# Altium PCB Master.PcbDoc
Units mm, origin at the board's own origin, x right, y up, seen from the top; angles counter-clockwise.
Board outline 60 x 48.5 mm, 2 copper layers (Top Layer, Bottom Layer); 56 components, 34 nets, 181 pads, 79 vias.
Unrouted connection lines stored in the file: 1.
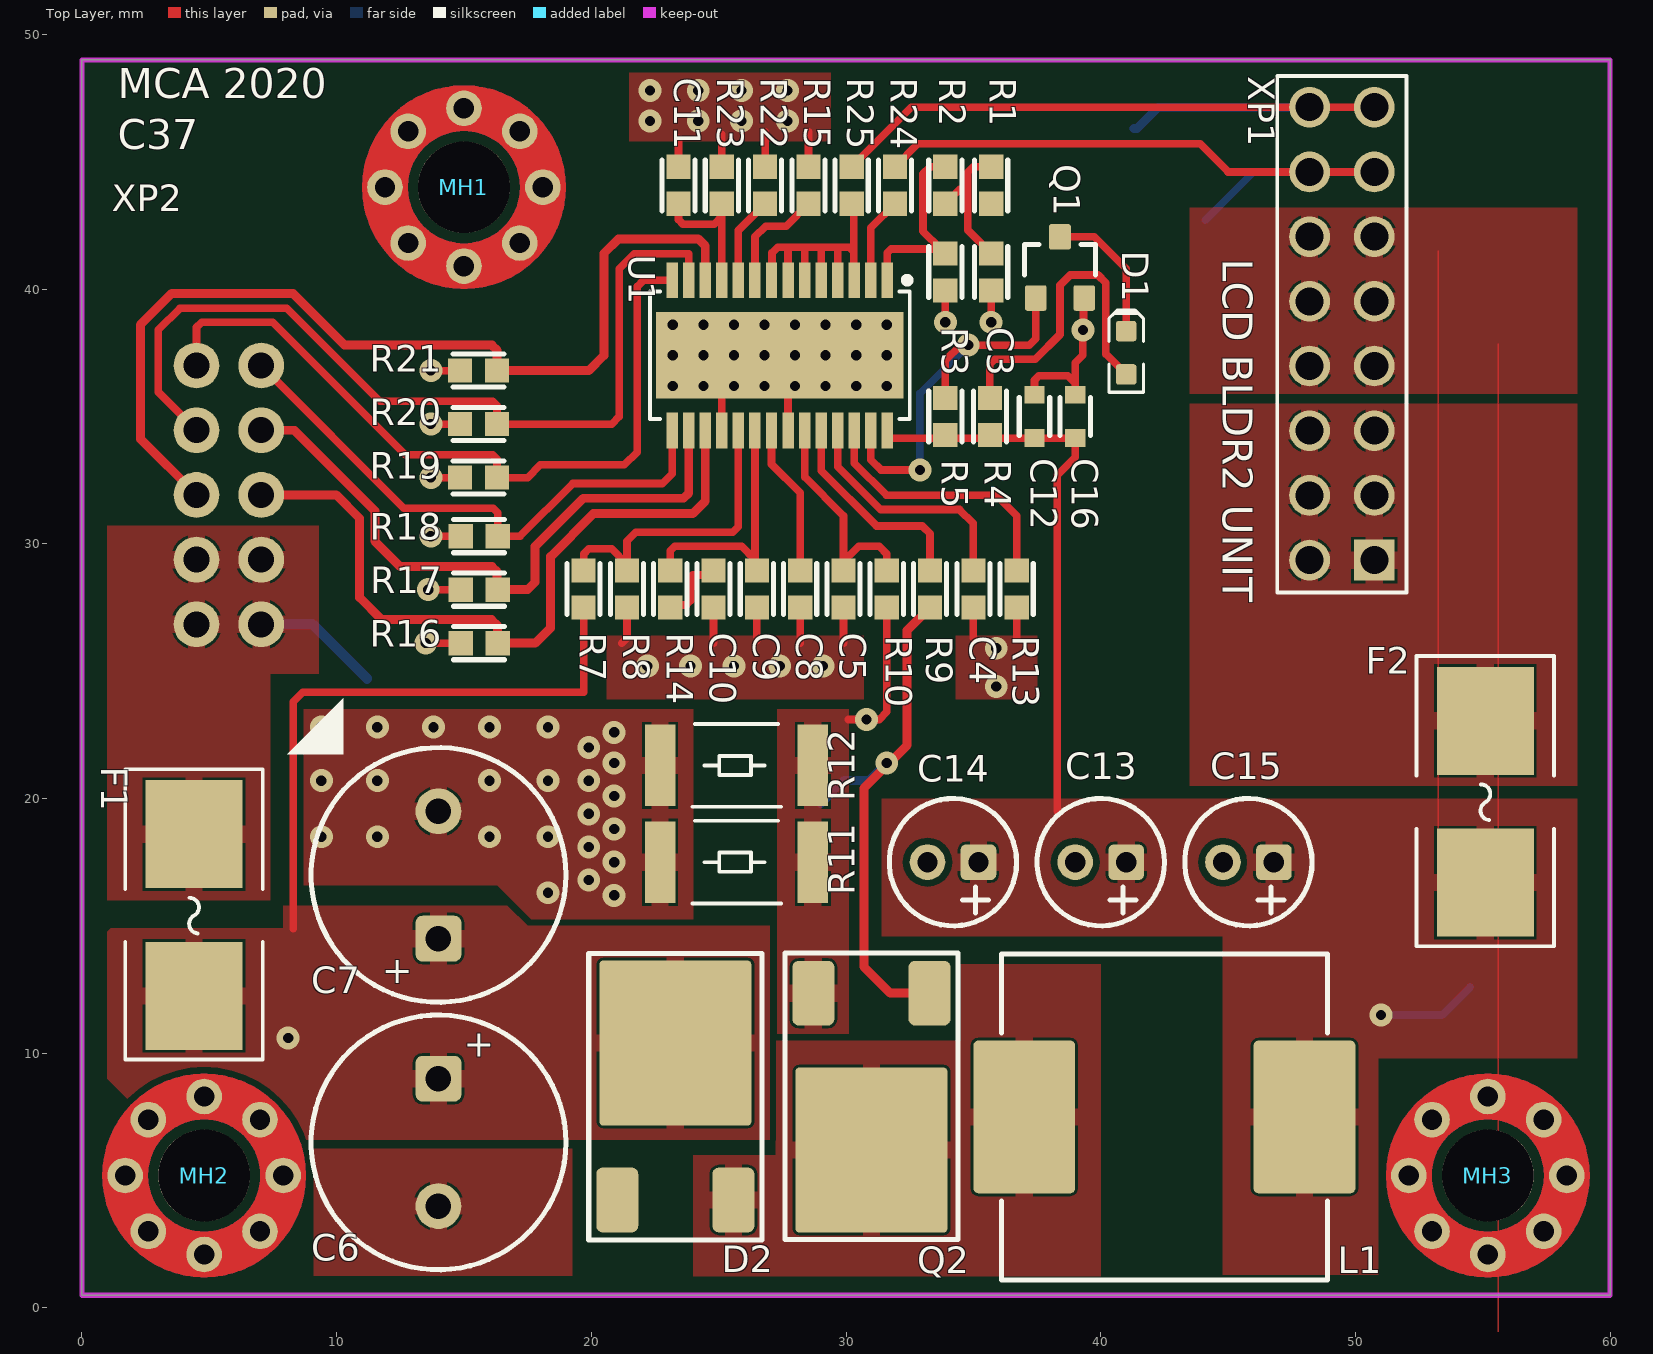
[diagram p0: Top Layer view]
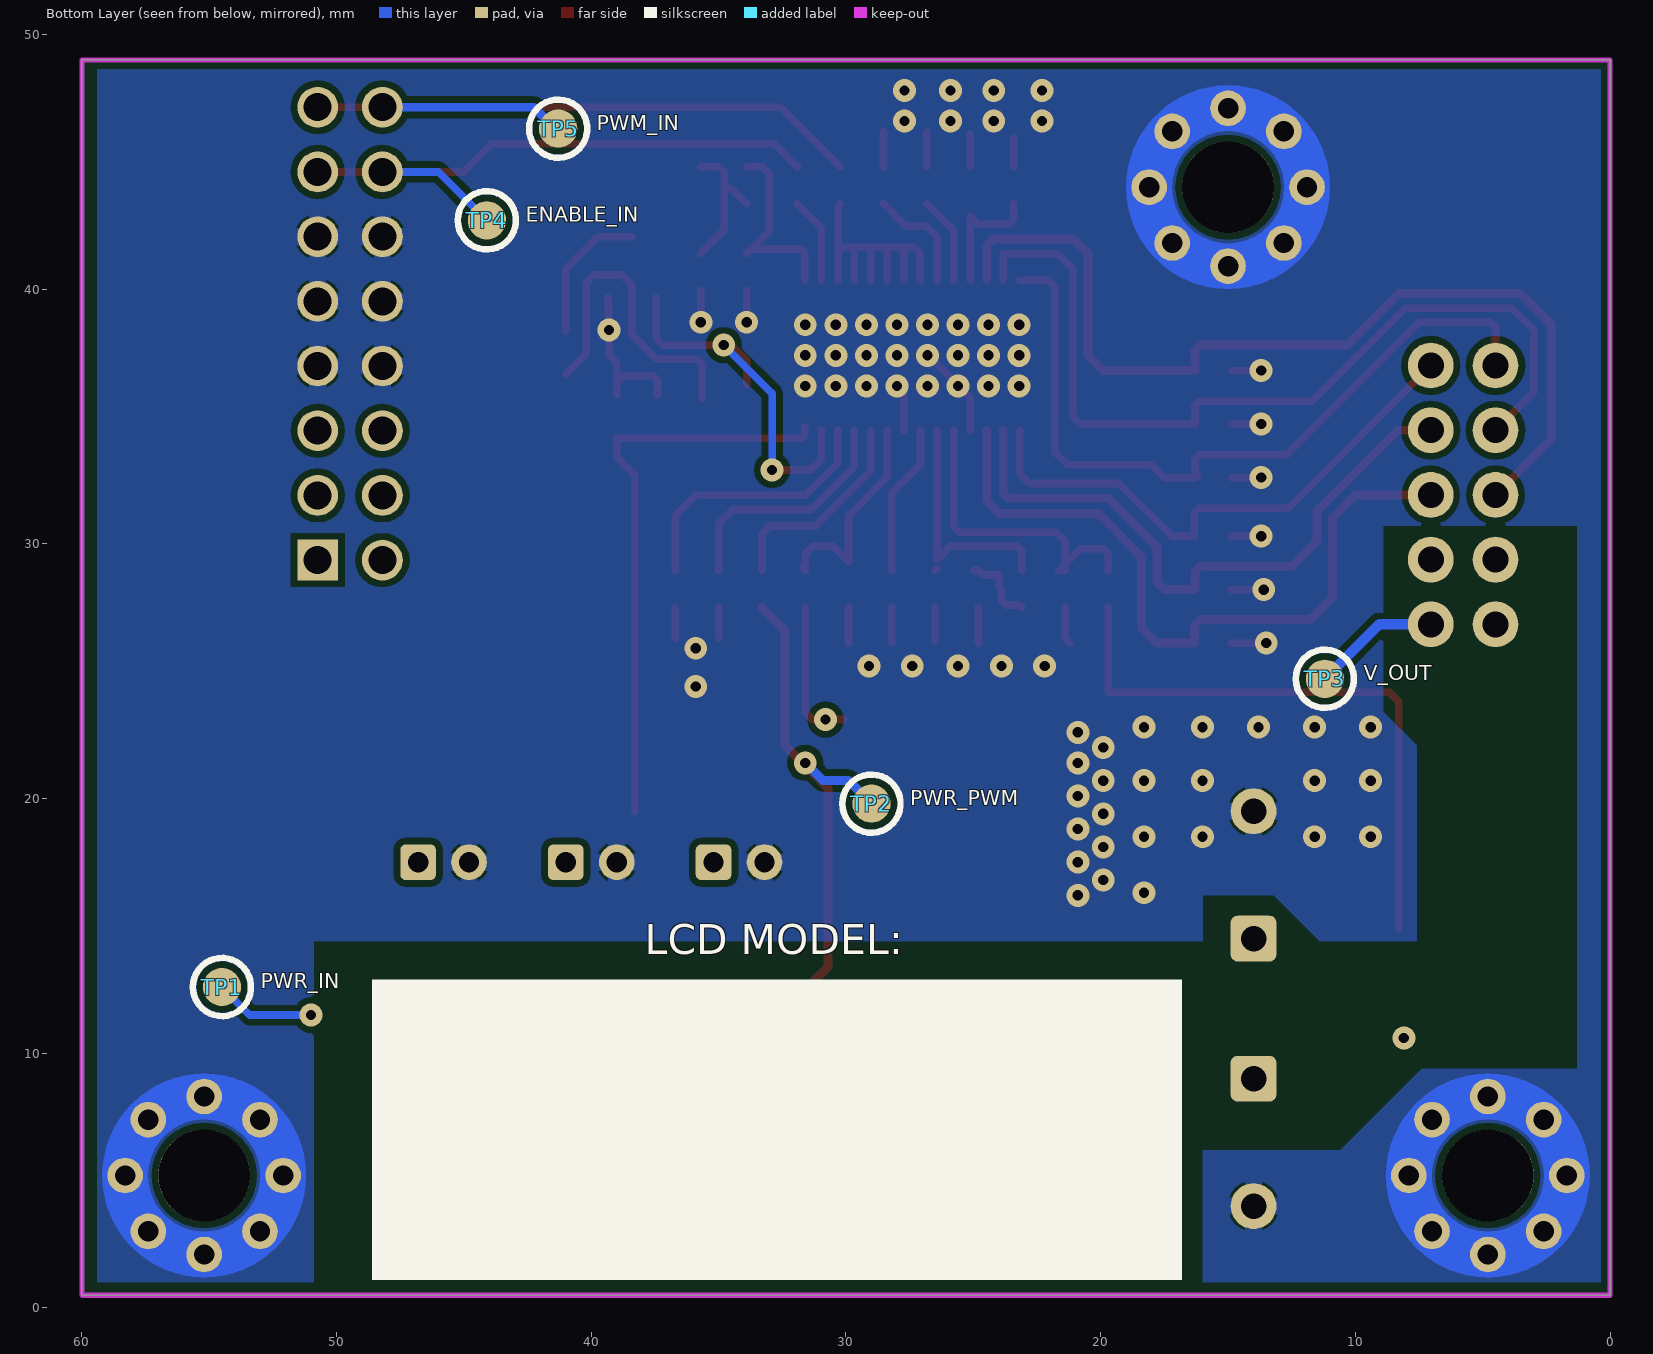
[diagram p1: Bottom Layer view, seen from below]

## Layer stack, top to bottom
Top Solder: solder mask 0.0102, Solder Resist, Dk 3.5
Top Layer: signal copper 0.0356
Dielectric 1: dielectric 0.32, FR-4, Dk 4.8
Bottom Layer: signal copper 0.0356
Bottom Solder: solder mask 0.0102, Solder Resist, Dk 3.5

## Board outline
0,0.5 0,49 60,49 60,0.5

## Design rules (kind name [scope] priority, off if disabled: settings)
Clearance Clearance_1 [(ObjectKind = 'Pad') And (Component = 'U1')] p1: gap=0.127 ignorepadtopadclearanceinfootprint=FALSE
Clearance [All] p2: gap=0.254 ignorepadtopadclearanceinfootprint=FALSE
HoleSize [All] p1: absolutevalues=TRUE maxlimit=10 minlimit=0.4 maxpercent=80.000 minpercent=20.000
PlaneConnect PlaneConnect_VIA [(ObjectKind = 'Via')] p1: planeconnectstyle=Direct reliefexpansion=0.508 reliefentries=4 reliefconductorwidth=0.254 reliefairgap=0.254
PlaneConnect [All] p2: planeconnectstyle=Relief reliefexpansion=0.7 reliefentries=4 reliefconductorwidth=0.5 reliefairgap=0.254
PolygonConnect PolygonConnect_VIA [(ObjectKind = 'Via')] p1: connectstyle=Direct reliefconductorwidth=0.254 reliefentries=4 polygonreliefangle="90 Angle" airgapwidth=0.254
PolygonConnect [All] p2: connectstyle=Relief reliefconductorwidth=0.7 reliefentries=4 polygonreliefangle="90 Angle" airgapwidth=0.1
RoutingVias [All] p1: holewidth=0.711 width=1.27 viastyle="Through Hole" minholewidth=0.711 minwidth=1.27 maxholewidth=0.711 maxwidth=1.27
SolderMaskExpansion [All] p1: expansion=0.102
Width [All] p1: maxlimit=12 minlimit=0.3 preferedwidth=0.3
28 further rules are at their usual default settings.

## Components (designator, comment, footprint, x,y, rotation, side; value= is the part's Value field where it differs from the comment)
C3 "0603-X7R-50-0.01 мкф" CAP_0603#1 35.7,40.675 r270 top
C4 "0603-X5R-10 1 мкф" CAP_0603#1 35,28.225 r270 top
C5 "0603-NP0-50-390 пф J" CAP_0603#1 29.9,28.225 r270 top
C6 "ECAP 47uF 100V 10x12.5" "CAP_ECR 10X12.5" 14,6.5 r270 top
C7 "ECAP 47uF 100V 10x12.5" "CAP_ECR 10X12.5" 14,17 r90 top
C8 "0603-X7R-10 2.2 мкф" CAP_0603#1 28.2,28.225 r270 top
C9 "0603-NP0-50-33 пф J" CAP_0603#1 26.5,28.225 r270 top
C10 "0603-X7R-50-0.033 мкф" CAP_0603#1 24.8,28.225 r270 top
C11 "0603-X7R-50-0.1 мкф" CAP_0603#1 23.425,44.075 r90 top
C12 "0603-X7R-10 2.2 мкф" CAP_0603#2 37.4,35 r90 top
C13 "ESX 50 в-10 мкф 5x11 Hitano" "CAP_ECR 5X11" 41,17.5 r180 top
C14 "ECAP (К50-35), 100мкФ, 35В, 105°C, 20%, 6.3x12мм P:2.5мм" "CAP_ECR 5X11" 35.2,17.5 r180 top
C15 "ECAP (К50-35), 100мкФ, 35В, 105°C, 20%, 6.3x12мм P:2.5мм" "CAP_ECR 5X11" 46.8,17.5 r180 top
C16 "0603-X7R-50-0.1 мкф" CAP_0603#2 39,35 r90 top
D1 "KPT-1608SURCK, KingBright" LED_0603_RED 41,37.5 r90 top value=KPT-1608SURCK
D2 "STPS5H100B" D-PAK 23.3,2.97 r0 top
F1 "2A" FUSE_LITTEL_0154 4.4,15.25 r90 top
F2 "" FUSE_LITTEL_0154 55.1,19.7 r90 top
L1 "47uH" INDUCTOR_B82477G 42.5,7.5 r180 top
MH1 "MOUNTING HOLE 3MM" "MOUNTING HOLE 3MM" 15,44 r0 top
MH2 "MOUNTING HOLE 3MM" "MOUNTING HOLE 3MM" 4.8,5.2 r0 top
MH3 "MOUNTING HOLE 3MM" "MOUNTING HOLE 3MM" 55.2,5.2 r0 top
Q1 "MMUN2214LT1G" SOT_23 38.4,40.85 r0 top locked
Q2 "FDD86102LZ" D-PAK 31,13.63 r180 top
R1 "0603-100к J" resistor_0603 35.7,44.075 r270 top value=100k
R2 "0603-100к J" resistor_0603 33.9,44.075 r270 top value=100k
R3 "0603-30к F" resistor_0603 33.9,40.675 r90 top value=30k
R4 "0603-7.5 к F" resistor_0603 35.65,35 r270 top value=7.5k
R5 "0603-30к F" resistor_0603 33.9,35 r270 top value=30k
R7 "0603-169 к F" resistor_0603 19.7,28.225 r270 top value=169k
R8 "0603-7.5 к F" resistor_0603 21.4,28.225 r90 top value=7.5k
R9 "0603-3 F" resistor_0603 33.3,28.225 r270 top value=3
R10 "0603-200 F" resistor_0603 31.6,28.225 r270 top value=200
R11 "2512-0.1 F" resistor_2512 25.7,17.5 r0 top value=0.1
R12 "2512-0.1 F" resistor_2512 25.7,21.3 r0 top value=0.1
R13 "0603-82 к J" resistor_0603 36.7,28.225 r270 top value=82k
R14 "0603-330 J" resistor_0603 23.1,28.225 r90 top value=330k
R15 "0603-560 к F" resistor_0603 28.525,44.075 r270 top value=560k
R16 "0603-10к J" resistor_0603 15.6,26.1 r0 top value=10k
R17 "0603-10к J" resistor_0603 15.6,28.2 r0 top value=10k
R18 "0603-10к J" resistor_0603 15.6,30.3 r0 top value=10k
R19 "0603-10к J" resistor_0603 15.575,32.6 r0 top value=10k
R20 "0603-10к J" resistor_0603 15.575,34.7 r0 top value=10k
R21 "0603-10к J" resistor_0603 15.575,36.8 r0 top value=10k
R22 "0603-82 к J" resistor_0603 26.825,44.075 r270 top value=82k
R23 "0603-69.8 к F" resistor_0603 25.125,44.075 r270 top value=69.8k
R24 "0603-3 F" resistor_0603 31.925,44.075 r270 top value=3
R25 "0603-3 F" resistor_0603 30.225,44.075 r270 top value=3
TP1 "PWR_IN" OTHER_SMD_TP_1.5MM 54.5,12.6 r180 bottom
TP2 "PWR_PWM" OTHER_SMD_TP_1.5MM 29,19.8 r180 bottom
TP3 "V_OUT" OTHER_SMD_TP_1.5MM 11.2,24.7 r180 bottom
TP4 "ENABLE_IN" OTHER_SMD_TP_1.5MM 44.1,42.7 r180 bottom
TP5 "PWM_IN" OTHER_SMD_TP_1.5MM 41.3,46.3 r180 bottom
U1 "TPS61196PWPT(R)" HTSSOP_28 27.4,37.4 r270 top
XP1 "IN" "CONN_PBD-16 RA" 49.47,40.79 r90 top locked
XP2 "OUT" CONN_IDC-10 5.77,31.92 r0 top

## Footprints (in the part's own frame and the unit in brackets; to place one, negate y for a bottom-side part, rotate by r counter-clockwise, add the part's x,y. Pads: shape width x height; smd on the part's side, far side on the other; paste and mask are expansions set on the pad)
CAP_0603#1 [mm] "Chip Capacitor, 2-Leads, Body 1,60x0,80mm, IPC Medium Density"
  rect 0.95x0.95 smd: 1(-0.725,0) 2(0.725,0)
  silkscreen extent -1,-0.65 1,0.65, body extent -0.89,-0.47 0.88,0.48, height 0.93
CAP_0603#2 [mm] "Chip Capacitor, 2-Leads, Body 1,60x0,80mm, IPC Medium Density"
  rect 0.7x0.8 smd: 1(-0.85,0) 2(0.85,0)
  silkscreen extent -0.75,-0.6 0.75,0.6, body extent -0.8,-0.41 0.8,0.41, height 0.92
"CAP_ECR 5X11" [mm]
  rrect30% 1.4x1.4 hole 0.8: 1(0,0)
  round 1.4 hole 0.8: 2(2,0)
  silkscreen extent -1.5,-2.5 3.5,2.5, body extent -1.51,-2.54 3.54,2.51, height 11.53
"CAP_ECR 10X12.5" [mm]
  rrect30% 1.8x1.8 hole 1: 1(-2.5,0)
  round 1.8 hole 1: 2(2.5,0)
  silkscreen extent -5,-5 5,5, body extent -5.03,-5.03 5.03,5.03, height 13.03
CONN_IDC-10 [mm]
  round 1.8 hole 1.02: 1(1.27,-5.08) 2(-1.27,-5.08) 3(1.27,-2.54) 4(-1.27,-2.54) 5(1.27,0) 6(-1.27,0) 7(1.27,2.54) 8(-1.27,2.54) 9(1.27,5.08) 10(-1.27,5.08)
  silkscreen extent 2.3,-10.18 4.5,-7.98, body extent -4.6,-10.2 4.4,10.15, height 9.1
"CONN_PBD-16 RA" [mm]
  rect 1.6x1.6 hole 1.1: 1(-11.43,-1.27)
  round 1.6 hole 1.1: 2(-11.43,1.27) 3(-8.89,-1.27) 4(-8.89,1.27) 5(-6.35,-1.27) 6(-6.35,1.27) 7(-3.81,-1.27) 8(-3.81,1.27) 9(-1.27,-1.27) 10(-1.27,1.27) 11(1.27,-1.27) 12(1.27,1.27) 13(3.81,-1.27) 14(3.81,1.27) 15(6.35,-1.27) 16(6.35,1.27)
  silkscreen extent -12.7,-2.54 7.57,2.54, body extent -12.68,-11.4 7.56,1.6, height 5.1
D-PAK [mm]
  rrect30% 1.65x2.54 smd: 1(-2.28,1.27) 2(2.28,1.27)
  rrect5% 5.97x6.48 smd: 3(0,7.43)
  silkscreen extent -3.4,-0.3 3.4,10.95, body extent -3.29,0.5 3.29,10.2, height 2.3
FUSE_LITTEL_0154 [mm]
  rect 4.24x3.81 smd: 1(-3,0) 2(3.35,0)
  silkscreen extent -5.5,-2.7 5.9,2.7, body extent -4.65,-2.5 5.05,2.5, height 3.64
HTSSOP_28 [mm] "HTSSOP-28, 28-Leads, Body 9,70x4,40mm, Pitch 0,65mm, Thermal Pad 9,70x3,40mm, IPC Medium Density"
  rect 1.4x0.45 smd: 1(-2.95,4.225) 2(-2.95,3.575) 3(-2.95,2.925) 4(-2.95,2.275) 5(-2.95,1.625) 6(-2.95,0.975) 7(-2.95,0.325) 8(-2.95,-0.325) 9(-2.95,-0.975) 10(-2.95,-1.625) 11(-2.95,-2.275) 12(-2.95,-2.925) 13(-2.95,-3.575) 14(-2.95,-4.225) 15(2.95,-4.225) 16(2.95,-3.575) 17(2.95,-2.925) 18(2.95,-2.275) 19(2.95,-1.625) 20(2.95,-0.975) 21(2.95,-0.325) 22(2.95,0.325) 23(2.95,0.975) 24(2.95,1.625) 25(2.95,2.275) 26(2.95,2.925) 27(2.95,3.575) 28(2.95,4.225)
  rect 3.4x9.7 smd mask+0: 29(0,0)
  silkscreen extent -3.07,-5.1 2.5,5.13, body extent -3.2,-4.9 3.2,4.9, height 1.2
INDUCTOR_B82477G [mm]
  rrect10% 4x6 smd: 1(-5.5,0) 2(5.5,0)
  silkscreen extent -6.4,-6.4 6.4,6.4, body extent -6.25,-6.25 6.25,6.25, height 7.5
LED_0603_RED [mm]
  round 0.254 on Mech15: 0(0,0)
  rrect25% 0.8x0.8 smd: 1(-0.85,0) 2(0.85,0)
  Top Layer pour cut-out: -0.5,0.5 0.5,0.5 0.5,-0.5 -0.5,-0.5
  silkscreen extent -1.55,-0.67 1.68,0.67, body extent -0.8,-0.4 0.8,0.4, height 0.75
"MOUNTING HOLE 3MM" [mm]
  round 1.4 hole 0.8: 0(-3.1,0) 0(-2.192,-2.192) 0(-2.192,2.192) 0(0,-3.1) 0(0,3.1) 0(2.192,-2.192) 0(2.192,2.192) 0(3.1,0)
  round 3.6 hole 3.6 unplated mask+0.4: 00(0,0)
  Top Layer circle w1.8: c0,0 r3.1
  Bottom Layer lines w1.8: 2.192,-2.192 cw(c0,0) 3.1,0 cw(c0,0) 2.192,-2.192
  body extent -3.5,-3.5 3.5,3.5, height 2.98
OTHER_SMD_TP_1.5MM [mm] "Test point"
  round 1.5 smd: 1(0,0)
  silkscreen extent -1.14,-1.14 1.14,1.14
resistor_0603 [mm] "Chip Capacitor, 2-Leads, Body 1,60x0,80mm, IPC Medium Density"
  rect 0.95x0.95 smd: 1(-0.725,0) 2(0.725,0)
  silkscreen extent -1,-0.65 1,0.65, body extent -0.8,-0.4 0.8,0.4, height 0.5
resistor_2512 [mm] "Chip Resistor, 2-Leads, Body 6,3x3,2mm, IPC Low Density"
  rect 1.2x3.2 smd: 1(-3,0) 2(3,0)
  silkscreen extent -1.73,-1.63 1.75,1.63, body extent -3.2,-1.6 3.2,1.6, height 0.55
SOT_23 [mm] "SOT-23; 3 Leads; Body 3.0 x 2.5 mm, inc. leads (LxW max)"
  rrect20% 0.85x1 smd: 1(-0.95,-1.2) 2(0.95,-1.2) 3(0,1.2)
  silkscreen extent -1.4,-0.3 1.4,0.9, body extent -1.5,-1.5 1.5,1.5, height 1.3

## Part data
C3 C5 C9 C10 C11 C16: "Конденсатор Чип Керамический", Voltage=50V, Foot=0603
  C3: Cap=0.01u
  C5: Cap=390p
  C9: Cap=33p
  C10: Cap=0.033u
  C11 C16: Cap=0.1u, Price, $=0.1
C4 C8 C12: "Конденсатор Чип Керамический", Voltage=10V, Foot=0603
  C4: Cap=1u
  C8 C12: Cap=2.2u
C6 C7: Voltage=100V, Analog="EXR 16 в-3300 мкф 16x26", Cap=47u
C13: "Конденсатор Алюминиевый Низкоимпедансный", Voltage=50V, Analog="EXR 50 в-10 мкф 5x11 Hitano", Cap=10u
C14 C15: library part "ECAP 50V 100uF 6.3x12", "Конденсатор электролитический алюминиевый", Voltage=50V, Cap=100u
D1: library part LED_0603_KPT-1608SURCK_red_120mcd, Analog=150060RS75000, HelpURL="L:\Dev\Техническая документация\Светодиоды\Kingbright\SMD\KPT-1608SURCK(0603).pdf"
D2: library part Schottky_STPS5H100B, "DIODE SCHOTTKY 5A 100V"
F1 F2: library part "FUSE_LITTEL 0154", "Плавкий предохранитель LITTELFUSE 0154"
L1: library part INDUCTOR_B82477G4473M, "47 мкГн, 2.5 А, 12.8х12.8, Катушка индуктивности SMD"
Q1: library part "BEC_MMUN2214LT1G_50V 0.1A 0.25W", "NPN Digital Transistor", PackageDocument=May-1999, DatasheetDocument=Jun-1999, PackageReference=SOT23, Published=17-Sep-2003, Publisher="Altium Limited"
Q2: library part MOSFET_FDD86102LZ, "MOSFET N-CHANNEL 100V 8A", URL=https://www.chipdip.ru/product/fdd86102lz-mosfet-n-channel-100v-8a
R1 R2: library part "0603-100 к J", "Резистор Чип", Power=0.1W, Foot=0603, Price, $=0.015
R3 R5: library part "0603-30 к F", "Резистор Чип", Power=0.1W, Tolerance=1%, Foot=0603
R4 R7 R8 R9 R10 R15 R23 R24 R25: "Резистор Чип", Power=0.1W, Tolerance=1%, Foot=0603
R11 R12: "Резистор Чип", Power=1W, Foot=2512
R13 R14 R22: "Резистор Чип", Power=0.1W, Foot=0603
  R14: Price, $=0.015
R16 R17 R18 R19 R20 R21: library part "0603-10 к J", "Резистор Чип", Power=0.1W, Foot=0603, Price, $=0.015
TP1 TP2 TP3 TP4 TP5: library part "Test Point_1.5MM"
U1: library part "LED DRV_TPS61196"
XP1: library part "CONN_PBD-16 RA", "Header, 8-Pin, Dual row", LatestRevisionDate=17-Jul-2002, LatestRevisionNote="Re-released for DXP Platform.", Publisher="Altium Limited"
XP2: library part "CONN_IDC-10 (Single Row)", "Header, 10-Pin", LatestRevisionDate=17-Jul-2002, LatestRevisionNote="Re-released for DXP Platform.", Publisher="Altium Limited"

## Via types
v1: diameter 0.9, hole 0.4, Top Layer to Bottom Layer, tented both sides, 79 vias

## Nets (pads, with @x,y where several pads share a name; then routed paths per layer and width w, separated by ;. In a path a pad name is that pad's centre, name@x,y a point inside that pad or via, vN(x,y) a via of type N, cw(c..) or ccw(c..) an arc to the next point about the centre after c; other vN are vias at no path point)
+12: C12.1 C13.1 C14.1 C15.1 C16.1 F2.1 L1.1 R1.2 R4.2 R5.2 TP1.1 U1.28 | length 26.7
  Top Layer w0.3: U1.28@31.625,34.575 U1.28 31.625,34.225 31.7,34.15 C12.1 C16.1 39,33.4 38.3,32.7 38.3,19.5
  Bottom Layer w0.3: v1(51,11.5) 53.4,11.5 TP1.1
COMP: C9.1 R14.2 U1.20 | length 9.6
  Top Layer w0.3: R14.2 23.1,29.724 23.276,29.9 25.9,29.9 26.425,29.375 U1.20 ; C9.1@26.425,29.025 C9.1
"ENABLE IN": R24.1 TP4.1 XP1.13 XP1.14 | length 24.6
  Top Layer w0.3: R24.1 31.9,44.825 31.95,44.825 32.825,45.7 43.9,45.7 45,44.6 XP1.14 XP1.13
  Bottom Layer w0.3: TP4.1 46,44.6 XP1.14
FSW: R13.1 U1.26 | length 10.7
  Top Layer w0.3: U1.26 30.325,33.167 31.592,31.9 35.9,31.9 36.7,31.1 R13.1
GND: C3.2 C4.2 C5.2 C6.2 C7.2 C8.2 C9.2 C10.2 C11.2 C12.2 C13.2 C14.2 C15.2 C16.2 MH1.0 MH2.0 MH3.0 Q1.2 R3.1 R8.1 R11.1 R12.1 R13.2 R15.1 R16.1 R17.1 R18.1 R19.1 R20.1 R21.1 R22.1 R23.1 U1.18 U1.22 U1.29 XP1.7 XP1.8 XP1.9 XP1.10 XP1.11 XP1.12 | length 35.2
  Top Layer w0.3: v1(13.5,26.1) R16.1 ; v1(13.6,28.2) R17.1 ; v1(13.7,30.3) R18.1 ; v1(13.7,32.6) R19.1 ; v1(13.7,34.7) R20.1 ; v1(13.7,36.8) R21.1 ; 21.2,26.1 21.4,26.3 R8.1 ; C11.2 23.425,45.925 ; 24.8,26.1 C10.2 ; U1.18 25.125,35.75 26.775,37.4 v1(26.8,37.4) ; R23.1 25.125,46.075 ; 26.5,26.2 C9.2 ; R22.1 26.825,46.175 ; U1.22 U1.29@27.725,36.2 ; 28.2,26.1 C8.2 ; R15.1 28.525,46.175 ; 29.9,26.1 C5.2 ; v1@33.9,39.1 R3.1 ; 35,26.3 C4.2 ; v1@35.7,39.1 C3.2 ; 36.7,26.3 R13.2 ; C12.2 37.4,36.424 37.576,36.6 38.7,36.6 39,36.3 ; C16.2 39,36.3 ; Q1.2 39.325,39.625 39.325,38.425 v1(39.3,38.4) 39.3,37.4 39,37.1 39,36.3
  other v1: 20.9,16.2 18.3,16.3 19.9,16.8 20.9,17.5 19.9,18.1 9.4,18.5 11.6,18.5 16,18.5 18.3,18.5 20.9,18.8 19.9,19.4 20.9,20.1 9.4,20.7 11.6,20.7 16,20.7 18.3,20.7 19.9,20.7 20.9,21.4 19.9,22 20.9,22.6 9.4,22.8 11.6,22.8 13.8,22.8 16,22.8 18.3,22.8 35.9,24.4 22.2,25.2 23.9,25.2 25.6,25.2 27.4,25.2 29.1,25.2 35.9,25.9 23.2,36.2 24.4,36.2 25.6,36.2 26.8,36.2 28,36.2 29.2,36.2 30.4,36.2 31.6,36.2 23.2,37.4 24.4,37.4 25.6,37.4 28,37.4 29.2,37.4 30.4,37.4 31.6,37.4 23.2,38.6 24.4,38.6 25.6,38.6 26.8,38.6 28,38.6 29.2,38.6 30.4,38.6 31.6,38.6 33.9,38.7 35.7,38.7 22.3,46.6 24.2,46.6 25.9,46.6 27.7,46.6 22.3,47.8 24.2,47.8 25.9,47.8 27.7,47.8
L1: R21.2 U1.12 XP2.6 | length 37.9
  Top Layer w0.35: XP2.6 2.3,34.12 2.3,38.6 3.533,39.833 8.286,39.833 10.319,37.8 16.095,37.8 16.3,37.595 R21.2 19.9,36.8 20.5,37.4 20.5,41.4 21.071,41.971 23.361,41.971 24.2,41.971 24.475,41.696 U1.12
L2: R20.2 U1.13 XP2.8 | length 35.3
  Top Layer w0.3: XP2.8 3,35.96 3,38.4 3.854,39.254 8.046,39.254 11.7,35.6 16.124,35.6 16.3,35.424 R20.2 20.8,34.7 21.1,35 21.1,40.8 21.692,41.392 23.825,41.392 U1.13
L3: R19.2 U1.14 XP2.10 | length 30.3
  Top Layer w0.3: XP2.10 4.5,38.5 4.7,38.7 7.5,38.7 12.7,33.5 16.124,33.5 16.3,33.324 16.3,32.8 16.2,32.7 R19.2 17.5,32.6 18,33.1 21.3,33.1 21.8,33.6 21.8,40.1 22.05,40.35 U1.14
L4: R18.2 U1.15 XP2.9 | length 22.2
  Top Layer w0.3: XP2.9 12.64,31.4 16.15,31.4 16.325,31.225 R18.2 17.2,30.3 19.267,32.367 22.791,32.367 23.175,32.751 U1.15
L5: R17.2 U1.16 XP2.7 | length 25.3
  Top Layer w0.35: XP2.7 8.34,34.46 11.504,31.296 11.504,30.104 12.504,29.104 16.095,29.104 16.3,28.899 16.3,28.225 R17.2 17.495,28.2 17.796,28.501 17.796,29.896 19.688,31.788 23.62,31.788 23.825,31.993 U1.16
L6: R16.2 U1.17 XP2.5 | length 28.8
  Top Layer w0.35: XP2.5 9.98,31.92 10.9,31 10.9,27.9 11.775,27.025 16.075,27.025 16.325,26.775 R16.2 17.8,26.1 18.4,26.7 18.4,29.5 20.084,31.184 23.984,31.184 24.475,31.675 U1.17
"LED P": F1.2 TP3.1 XP2.1 XP2.2 XP2.3 XP2.4 | length 5
  Bottom Layer w0.4: XP2.1 9.06,26.84 TP3.1
NetC3_1: C3.1 R1.1 R2.2 | length 5.8
  Top Layer w0.3: R2.2 34.471,43.921 34.542,43.921 34.779,44.158 ; C3.1 34.779,42.321 34.779,44.158 ; R1.1 35,44.8 34.779,44.579 34.779,44.158
NetC4_1: C4.1 U1.25 | length 9.5
  Top Layer w0.3: U1.25 29.675,33.033 31.362,31.346 34.454,31.346 35,30.8 C4.1
NetC5_1: C5.1 R10.1 U1.23 | length 8.6
  Top Layer w0.3: U1.23 28.375,32.625 29.9,31.1 29.9,29.3 30.5,29.9 31.3,29.9 31.6,29.6 31.6,29.15 31.7,29.05 R10.1
NetC6_1: C6.1 C7.1 D2.3 F1.1 R7.2 | length 23.8
  Top Layer w0.3: 8.3,14.9 8.3,23.8 8.676,24.176 19.7,24.176 R7.2
  other v1: 8.1,10.6
NetC10_1: C10.1 R14.1 | length 3
  Top Layer w0.3: R14.1 23.2,27.6 23.724,27.6 23.9,27.776 23.9,28.229 23.979,28.308 23.979,28.774 24.624,28.774 C10.1 C10.1@24.979,28.95
NetC11_1: C11.1 R23.2 U1.11 | length 5
  Top Layer w0.3: C11.1 23.425,42.726 23.601,42.55 24.825,42.55 25.125,42.85 U1.11
NetD1_1: D1.1 R4.1 | length 12.5
  Top Layer w0.3: R4.1 35.65,37.05 35.846,37.246 37.429,37.246 38.402,38.219 38.402,40.149 38.807,40.554 39.893,40.554 40.196,40.251 40.196,37.454 D1.1
NetD1_2: D1.2 Q1.3 | length 5.6
  Top Layer w0.3: Q1.3 39.75,42.05 41,40.8 D1.2
NetD2_2: D2.2 L1.2 Q2.3
NetQ1_1: Q1.1 R5.1 U1.27 | length 15.4
  Top Layer w0.3: U1.27 30.975,33.3 31.375,32.9 v1(32.9,32.9) ; 33.9,36.225 33.9,37.2 34.5,37.8 v1(34.8,37.8) 37.2,37.8 37.45,38.05 Q1.1
  Bottom Layer w0.3: v1(32.9,32.9) 32.9,35.9 v1(34.8,37.8)
NetQ2_1: Q2.1 R9.2 TP2.1 | length 21.5
  Top Layer w0.3: Q2.1 Q2.1@33.3,12.38
  Top Layer w0.35: Q2.1 31.74,12.36 30.7,13.4 30.7,20.4 32.4,22.1 32.4,26.6 R9.2
  Bottom Layer w0.35: TP2.1 29.911,20.711 30.911,20.711 v1(31.6,21.4)
NetQ2_2: Q2.2 R10.2 R11.2 R12.2 | length 5.7
  Top Layer w0.3: 30.1,23.1 31.3,23.1 31.6,23.4 R10.2
  other v1: 30.8,23.1
NetR2_1: R2.1 R3.2 U1.1 | length 7.7
  Top Layer w0.3: U1.1 31.625,41.425 31.776,41.576 R3.2@33.724,41.576 ; R3.2 R3.2@33.724,41.576 ; R2.1 33.3,44.8 33.021,44.521 33.021,42.279 R3.2@33.724,41.576
NetR7_1: R7.1 R8.2 U1.19 | length 12.8
  Top Layer w0.3: R7.1 19.7,29.6 19.9,29.8 20.8,29.8 R8.2@21.4,29.2 ; U1.19 25.775,30.675 25.554,30.454 21.754,30.454 21.4,30.1 R8.2@21.4,29.2 ; R8.2@21.4,29.2 21.65,28.95 R8.2 R8.2@21.4,29.2
NetR9_1: R9.1 U1.24 | length 8.3
  Top Layer w0.3: U1.24 29.025,32.875 31.2,30.7 33,30.7 33.3,30.4 R9.1
NetR15_2: R15.2 U1.9 | length 4.3
  Top Layer w0.3: U1.9 26.425,42.05 26.846,42.471 27.646,42.471 R15.2
NetR22_2: R22.2 U1.10 | length 3.4
  Top Layer w0.3: U1.10 25.775,42.3 R22.2
NetR24_2: R24.2 U1.2 | length 3.4
  Top Layer w0.3: U1.2 30.975,42.4 R24.2
NetR25_2: R25.2 U1.3 U1.4 U1.5 U1.6 U1.7 U1.8 | length 12.8
  Top Layer w0.3: U1.8 27.096,40.371 27.096,41.421 27.325,41.65 27.725,41.65 ; U1.7 27.725,41.65 ; U1.6 28.375,41.6 28.425,41.65 ; U1.5 29.025,41.65 ; U1.4 29.675,41.55 29.575,41.65 ; R25.2 30.304,43.271 30.304,41.471 ; U1.3 30.304,40.371 30.304,41.471 ; 27.725,41.65 28.425,41.65 ; 28.425,41.65 29.025,41.65 ; 29.025,41.65 29.575,41.65 ; 29.575,41.65 30.125,41.65 30.304,41.471
"PWM IN": R25.1 TP5.1 XP1.15 XP1.16 | length 28.7
  Top Layer w0.3: R25.1 32.565,47.14 XP1.16 XP1.15
  Bottom Layer w0.35: TP5.1 41.423,46.3 42.263,47.14 XP1.16
PWR: F2.2 XP1.1 XP1.2 XP1.3 XP1.4 XP1.5 XP1.6
REF: C8.1 U1.21 | length 6
  Top Layer w0.3: U1.21 27.075,33.125 28.2,32 C8.1
pads on no net: D1.0 D2.1 MH1.00 MH2.00 MH3.00

## Polygon pours and split planes (outlines as drawn)
GND on Top Layer (solid, pour order 256): 43.5,43.2 43.5,35.9 58.7,35.9 58.7,43.2
PWR on Top Layer (solid, pour order 252): 43.5,35.5 43.5,20.5 58.7,20.5 58.7,35.5
+12 on Top Layer (solid, pour order 248): 44.8,1.3 44.8,20 58.7,20 58.7,9.8 50.9,9.8 50.9,1.3
GND on Top Layer (solid, pour order 244): 21.5,48.5 21.5,45.8 29.4,45.8 29.4,48.5
GND on Top Layer (solid, pour order 240): 34.3,26.4 34.3,23.9 37.5,23.9 37.5,26.4
GND on Top Layer (solid, pour order 238): 20.6,26.4 20.6,23.9 30.7,23.9 30.7,26.4
"LED P" on Top Layer (solid, pour order 236): 1,16 1,30.7 9.3,30.7 9.3,24.9 7.4,24.9 7.4,16
+12 on Top Layer "Top Layer-+12" (solid, pour order 232): 49.2,20 49.2,14.6 31.4,14.6 31.4,20
GND on Top Layer "Top Layer-GND" (solid, pour order 228): 24,23.5 24,15.1 17.8,15.1 16.3,16.6 8.7,16.6 8.7,23.2 8.7,23.5
NetQ2_2 on Top Layer "Top Layer-NetQ2_2" (solid, pour order 222): 27.3,10.6 27.3,23.5 30.1,23.5 30.1,10.6
NetD2_2 on Top Layer "Top Layer-NetD2_2" (solid, pour order 208): 40,13.5 40,1.25 24,1.25 24,6 27.25,6 27.25,10.5 34.5,10.5 34.5,13.5
GND on Top Layer "Top Layer-GND 1" (solid, pour order 206): 19.25,6.25 19.25,1.261 9.1,1.261 9.1,6.25
NetC6_1 on Top Layer "Top Layer-NetC6_1" (solid, pour order 198): 27,6.6 3.4,6.6 1,9 1,15.8 16.7,15.8 17.5,15 27,15
no net on Top Layer "Top Layer-No Net 16" (solid, pour order 172): 53.25,41.5 53.25,17.7
no net on Top Layer "Top Layer-No Net 14" (solid, pour order 166): 18.5,33
no net on Top Layer "Top Layer-No Net 15" (solid, pour order 154): 15.474,5.5
no net on Top Layer "Top Layer-No Net 11" (solid, pour order 114): 55.477,14.5
no net on Top Layer "Top Layer-No Net 12" (solid, pour order 94): 17.1,11
no net on Top Layer "Top Layer-No Net 13" (solid, pour order 84): 55.6,10.5
no net on Top Layer "Top Layer-No Net" (solid, pour order 78): 2.1,-6.25
no net on Top Layer "Top Layer-No Net 1" (solid, pour order 74): -0.3,45.1
no net on Top Layer "Top Layer-No Net 2" (solid, pour order 60): 55.2,37.5
no net on Top Layer "Top Layer-No Net 3" (solid, pour order 54): 55.6,37.85 55.6,-19.5
no net on Top Layer "Top Layer-No Net 4" (solid, pour order 52): 0.25,47.5
no net on Top Layer "Top Layer-No Net 5" (solid, pour order 32): 55.2,35.4
no net on Top Layer "Top Layer-No Net 6" (solid, pour order 20): 9.075,85.35
no net on Top Layer "Top Layer-No Net 7" (solid, pour order 18): 14.7,85.35
no net on Top Layer "Top Layer-No Net 8" (solid, pour order 14): 3.45,90.85
no net on Top Layer "Top Layer-No Net 9" (solid, pour order 8): 2.2,84.6
no net on Top Layer "Top Layer-No Net 10" (solid, pour order 0): 6.7,89.1
GND on Bottom Layer (solid, pour order 254): 0.3,48.7 59.4,48.7 59.4,1 0.3,1
no net on Bottom Layer "Bottom Layer-No Net" (solid, pour order 66): 55.2,37.5
no net on Bottom Layer "Bottom Layer-No Net 1" (solid, pour order 46): 55.2,35.4
no net on Mechanical 1 (solid): 55.1,31

## Keep-outs
Keep-Out Layer:
  the board outline again, w0.2

## Other copper
Top Layer:
  pour cut-out: 1,15.8 1,14.9 7.9,14.9 7.9,15.8
  pour cut-out: 2.241,16.5
Bottom Layer:
  pour cut-out: 16,6.2 10.6,6.2 7.4,9.4 1.3,9.4 1.3,14.4 11.4,14.4 13.2,16.2 16,16.2
  pour cut-out: 1.3,14.4 1.3,30.7 8.9,30.7 8.9,23.4 7.6,22.1 7.6,14.4
  pour cut-out: 50.9,14.4 50.9,1 16,1 16,14.4

## Silkscreen, mask and mechanical layers (free items; w line width, h text height)
Top Overlay:
  text "MCA 2020 / C37" at 1.4,45.1 h2
  text "LCD BLDR2 UNIT" at 44.4,41.2 h2 r270
Bottom Overlay:
  rectangle: 16.8,1.1 48.6,12.9
  text "LCD MODEL:" at 37.9,13.5 h2

## Text inside footprints (layer, text, board x,y; h text height)
C6: Top Overlay "+" at 15,9.5 h1.8; Mechanical 8 "+" at 13,11.1 h1.8 r270
C7: Top Overlay "+" at 13,14 h1.8 r180; Mechanical 8 "+" at 15,12.4 h1.8 r90
C13: Mechanical 8 "+" at 42.2,18.1 h1.8 r180
C14: Mechanical 8 "+" at 36.4,18.1 h1.8 r180
C15: Mechanical 8 "+" at 48,18.1 h1.8 r180